# EAGLE board afe_rev_05-12-17 (EAGLE 8.4.3)
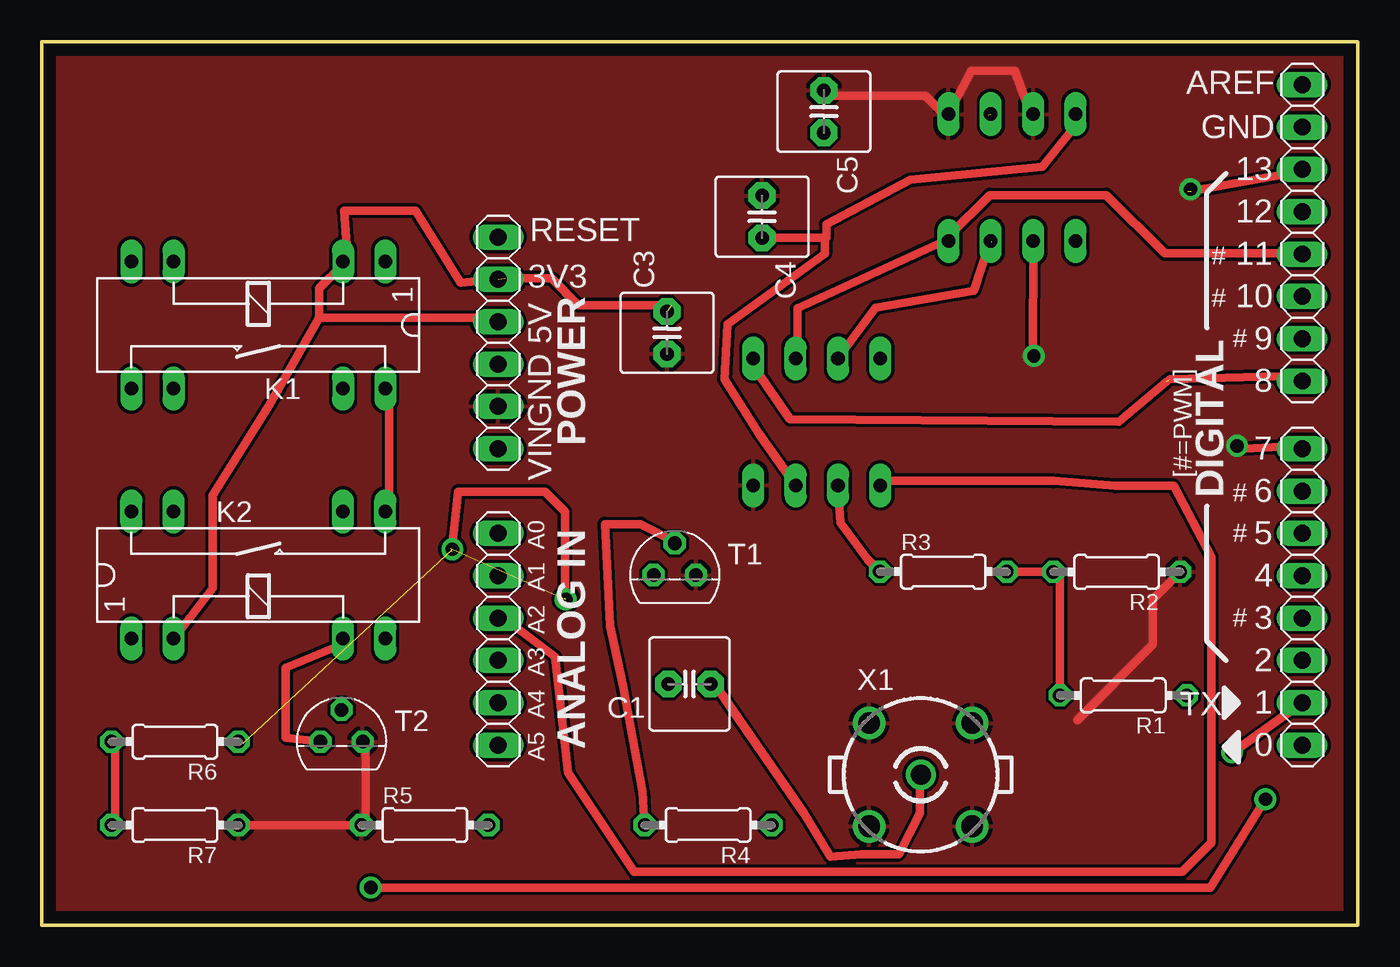
[diagram p0: board, top side]
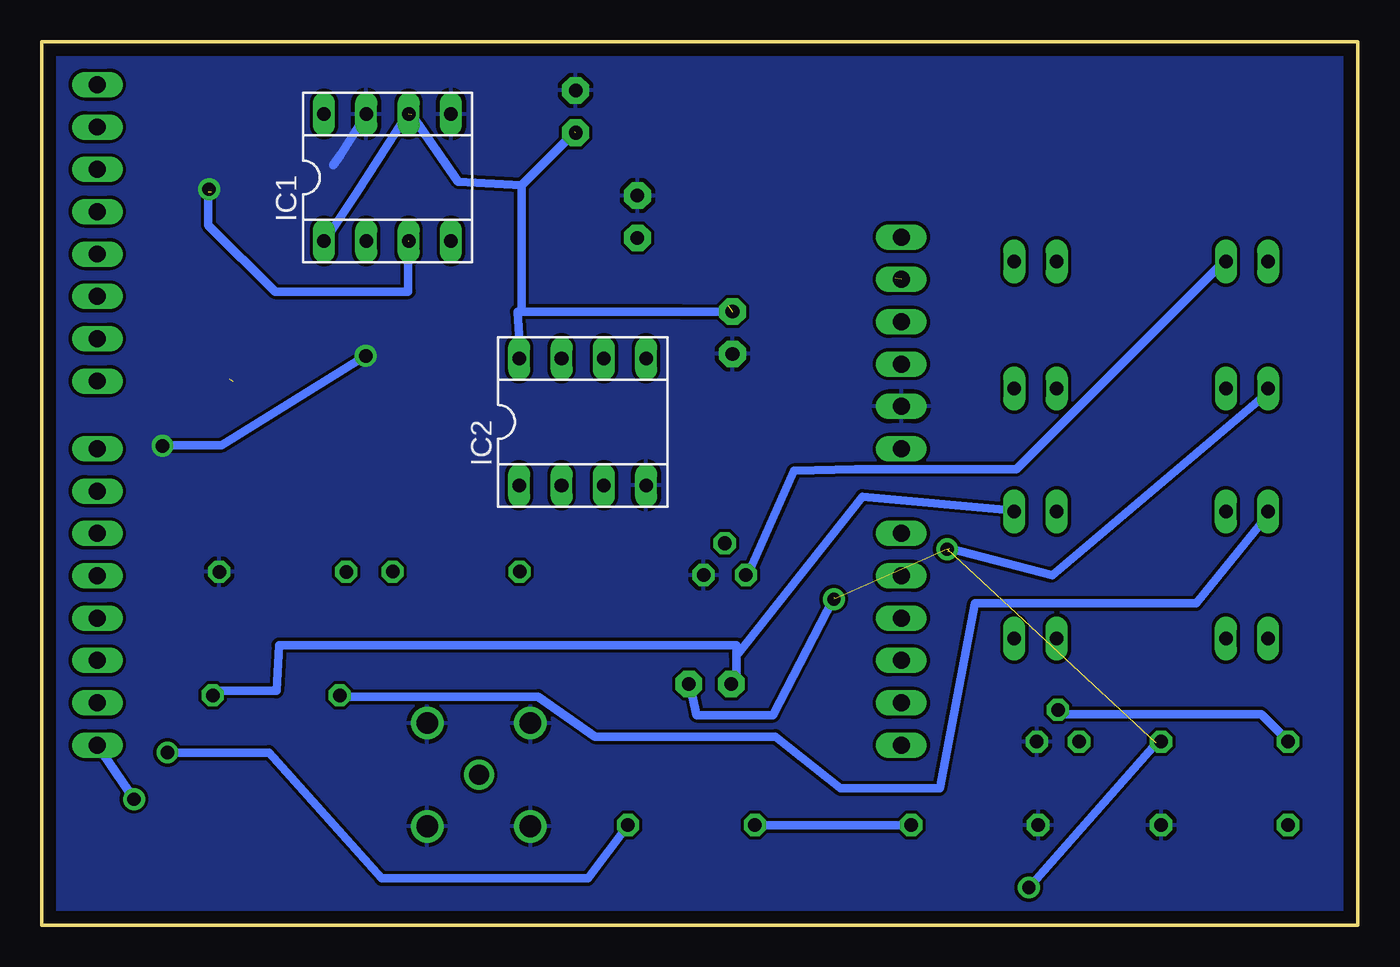
[diagram p1: board, bottom side, seen from below]

Size 79 x 53 mm. Coordinates in mm from the lower left corner, seen from the top.
Outline: 0,0 79,0 79,53 0,53 0,0
Copper layers (1*16): Top 0.035mm / dielectric 1.5mm / Bottom 0.035mm
Design rules "default *": minimum track width 0.5mm, minimum drill 12mil, track to track 0.2mm, track to pad 0.2mm, pad to pad 0.2mm, via to via 0.2mm, smd to smd 0.2mm, copper to edge 30mil, drill to drill 12mil, minimum pad ring 10mil, minimum via ring 10mil, stop-mask expansion 1mil, vias tented up to drill 0mil, thermal gap 10mil
Net classes: 0 default: width 0.152 mm, drill 0.305 mm, clearance 0.152 mm

## Footprints (pad centres in the part's own frame; a part is rotated, then mirrored left to right if it is on the bottom)
1X06 = drill 1.016 long: 1 -6.35,0; 2 -3.81,0; 3 -1.27,0; 4 1.27,0; 5 3.81,0; 6 6.35,0
C2.5-6 = drill 0.813 pad 1.6 octagon: 1 -1.27,0; 2 1.27,0
SOCKET-08 = drill 0.813 long: 1 -3.81,-3.81; 2 -1.27,-3.81; 3 1.27,-3.81; 4 3.81,-3.81; 5 3.81,3.81; 6 1.27,3.81; 7 -1.27,3.81; 8 -3.81,3.81
1X08 = drill 1.016 long: 1 -8.89,0; 2 -6.35,0; 3 -3.81,0; 4 -1.27,0; 5 1.27,0; 6 3.81,0; 7 6.35,0; 8 8.89,0
HE751 = drill 0.813 long: 1 -7.62,-3.81; 2 -5.08,-3.81; 6 5.08,-3.81; 7 7.62,-3.81; 8 7.62,3.81; 9 5.08,3.81; 13 -5.08,3.81; 14 -7.62,3.81
0204/7 = drill 0.813 octagon: 1 -3.81,0; 2 3.81,0
TO92 = drill 0.813 octagon: 1 1.27,0; 2 0,1.905; 3 -1.27,0
B35N61 = drill 1.2: 1 0,0 | drill 1.3: 2 3.099,3.099; 3 -3.099,3.099; 4 -3.099,-3.099; 5 3.099,-3.099

## Placement (x,y rotation side)
AD  [1X06]  27.4,17.14 270 top
C1  100n  [C2.5-6]  38.88,14.46 180 top
C3  100n  [C2.5-6]  37.53,35.53 90 top
C4  100n  [C2.5-6]  43.24,42.49 270 top
C5  100n  [C2.5-6]  46.95,48.8 270 top
IC1  [SOCKET-08]  58.24,44.85 0 bottom
IC2  [SOCKET-08]  46.52,30.18 0 bottom
IOH  [1X08]  75.66,41.53 90 top
IOL  [1X08]  75.66,19.69 90 top
K1  HE751  [HE751]  13,36 180 top
K2  HE751  [HE751]  13,21 0 top
POWER  [1X06]  27.4,34.92 270 top
R1  9.1M  [0204/7]  64.92,13.78 180 top
R2  1M  [0204/7]  64.53,21.19 180 top
R3  27k  [0204/7]  54.12,21.2 0 top
R4  1k  [0204/7]  40,6 180 top
R5  10k  [0204/7]  23,6 0 top
R6  1k  [0204/7]  8,11 180 top
R7  10k  [0204/7]  8,6 180 top
T1  BC337  [TO92]  38,21 0 top
T2  BC337  [TO92]  18,11 0 top
X1  BN35N61  [B35N61]  52.76,9.02 0 top

## Library data of the parts
AD IOH IOL POWER = pinhead
C1 C3-C5 = capacitor-wima
IC1 IC2 = ic-package
K1 K2 = relay; OC_FARNELL: unknown; OC_NEWARK: unknown
R1-R7 = resistor
T1 T2 = transistor-neu-to92
X1 = con-coax; OC_FARNELL: unknown; OC_NEWARK: unknown

## Nets
5V: K1.2 K2.2 POWER.3
AC_DC: C1.1 K1.8 X1.1
CH0: IC2.2 R3.1
CS1: IOL.8
CS2: IC2.5 IOH.1
GND: C3.1 C4.1 C5.1 IC1.5 IC1.7 IC2.4 POWER.5 R2.1 R5.1 R7.1 T1.1 T2.1 X1.2 X1.3 X1.4 X1.5
MOSI: IC1.4 IC2.6 IOH.4
N$2: K1.6 T1.3
N$3: R4.2 R5.2
N$4: R6.2 R7.2 T2.2
N$5: K2.6 T2.3
N$7: IOL.1 R6.1
N$8: IOL.2 R4.1
N$13: K2.14 R1.2 R2.2 R3.2
S$1: IC1.8
S$2: IC1.2
SCLK: IC1.3 IC2.7 IOH.6
VDD: C3.2 C5.2 IC1.1 IC1.6 IC2.8 POWER.2
VOUT: AD.3 IC2.1
VOUT-VREF: C4.2 IC2.3
X1_X10: C1.2 K1.14 K2.8 R1.1

## Tracks (layer width: path | path; a pad name or v marks a point on that pad's centre or on a via)
5V
  Top 0.5: 16.65,36.45 16.65,38.2 18.05,39.6 K1.2 | 16.65,36.45 13.65,31.2 10.25,25.8 10.25,20.2 K2.2 | 16.65,36.45 27.15,36.45 POWER.3
AC_DC  (2 unrouted)
  Top 0.5: X1.1 52.7,8.8 52.7,6.7 51.45,4.25 49.2,4.25 47.35,4.1 45.75,6.7 40.45,14.4 C1.1
  Top 0.508: 31.4,19.6 31.4,24.8 30.2,26 25,26 24.6,22.4
  Bottom 0.5: 24.55,22.6 18.35,21 5.45,31.9 K1.8 | 31.45,19.65 35.1,12.6 39.7,12.6 40.1,14.4 C1.1
CH0
  Top 0.5: IC2.2 47.8,26.3 47.95,24.15 49.55,21.95 R3.1
CS1
  Top 0.5: 71.65,28.55 75.45,28.75 IOL.8
CS2  (1 unrouted)
  Top 0.5: 67.5,32.6 64.65,30.2 44.9,30.35 42.9,33.25 IC2.5 | 67.7,32.75 75.45,32.95 IOH.1
GND  (via drill 0.8)
  Top 0.5: IC1.7 59.35,48.7 58.4,51.25 55.8,51.25 54.45,48.7 IC1.5 54.1,48.7 53.05,49.75 47.1,49.75 C5.1 | R7.1 R5.1 19.45,6 19.45,10.9 T2.1 | 55.85,6 X1.5 | 55.85,11.95 X1.2 56.2,12.3 | 62.15,12.3 66.7,16.85 66.7,19.55 R2.1
  Bottom 0.5: 61.5,45.6 61.05,46.2 59.7,48.35 IC1.7
  other vias: 71.75,28.75 68.95,44.15 59.55,34.15
  pour Top: -4,55 83,55 83,-2 -4,-2
  pour Bottom: -2,59 85,59 85,-4 -2,-4
MOSI
  Top 0.5: IC2.6 45.35,34 45.35,37 54.1,41 IC1.4 54.45,41.35 56.9,43.8 63.9,43.8 67.4,40.3 75.45,40.3 IOH.4
N$2
  Bottom 0.5: T1.3 36.6,21.05 33.85,27.25 30.15,27.35 20.5,27.35 8.25,39.6 K1.6
N$3
  Top 0.5: 33.8,24.05 34.1,17.95 34.9,14.35 36.05,8 R4.2
  Top 0.508: 33.8,24.05 35.95,24.05 38,23
  Bottom 0.5: R4.2 R5.2
N$4
  Top 0.5: R7.2 4.4,6 4.4,10.9 R6.2
  Bottom 0.5: T2.2 17.7,12.65 5.8,12.65 4.4,11.25 R6.2
N$5
  Top 0.5: T2.3 14.65,11.25 14.65,15.45 18.05,16.85 K2.6
N$7  (via drill 0.8)  (2 unrouted)
  Top 0.5: v19.75,2.25 70.15,2.25 v73.45,7.55
  Bottom 0.5: v19.75,2.25 12.1,10.9 R6.1 | v73.45,7.55 IOL.1
  other vias: 31.45,19.55 24.65,22.55
N$8  (via drill 0.8)
  Top 0.5: v71.45,10.35 IOL.2
  Bottom 0.5: 71.65,10.55 v71.45,10.35 65.35,10.35 58.6,2.8 46.21,2.8 R4.1
N$13
  Top 0.152: R2.2
  Top 0.5: R2.2 R3.2 | R2.2 61.11,20.8 R1.2
  Bottom 0.5: K2.14 5.45,24.55 9.7,19.3 23,19.3 25.1,8.2 31.05,8.2 34.95,11.3 45.8,11.3 49.2,13.7 61.1,13.7 R1.2
S$1
  Top 0.5: IC1.8 61.8,48.35 61.8,47.65 60.05,45.5 52.15,44.7 47.1,42.05 47.1,41.23
S$2
  Top 0.5: 59.5,34.2 IC1.2
S$3
  Bottom 0.152: 72,29 71.8,28.8
  Bottom 0.508: 71.8,28.8 68.2,28.8 59.8,34
SCLK  (2 unrouted)
  Top 0.5: IC2.7 50.05,37.05 55.95,38.05 56.9,41 IC1.3 | 68.8,44 75.45,45.2 IOH.6
  Bottom 0.508: 69,44 69,42 65,38 57,38 57,41
VDD  (4 unrouted)
  Top 0.5: 56.9,48.35 IC1.6 | 18.4,39.6 18.15,42.85 22.45,42.85 25.15,38.55 POWER.2
  Top 0.508: 37.8,37.2 32.2,37.2 30.6,38.8 27.8,38.8
  Bottom 0.5: IC2.8 50.25,34 50.45,36.8 50.2,36.8 40.65,36.8 C3.2 | IC1.1 61.8,41.35 60.2,43.8 57.25,48.35 IC1.6
  Bottom 0.508: 50.2,36.8 50.2,44.4 | 50.2,44.4 47,47.6 | 50.2,44.4 54,44.6 56.8,48.6
VOUT
  Top 0.5: IC2.1 50.6,26.65 60.75,26.65 64.45,26.35 67.95,26.35 70.2,22.1 70.2,4.95 68.45,3.2 35.55,3.2 31.6,9.15 30.8,16.1 27.5,18.6 AD.3
VOUT-VREF
  Top 0.5: C4.2 47,41.23 47,40.27 41.18,36.04 40.98,32.75 43.05,29.47 IC2.3
X1_X10
  Top 0.5: 68.45,13.7 R1.1 | K2.8 20.85,24.9 20.85,31.9 K1.14
  Bottom 0.5: 37.3,16.15 37.3,16.8 64.75,16.8 64.9,14.05 68.45,14.05 R1.1 | 37.3,16.15 37.3,14.75 C1.2 | 37.3,16.15 29.75,25.7 20.85,24.9 K2.8

## Text on the board
tPlace: 13 | 12 | 11 | 10 | 9 | 8 | 7 | 6 | 5 | 4 | 3 | 2 | 1 | 0
tNames: AREF | GND | RESET | # | 3V3 | 5V | # | DIGITAL | # | GND | [#=PWM] | VIN | # | A0 | ANALOG IN | # | A1 | A2 | # | A3 | A4 | TX | A5
214bmp: D:/SmartProjects/Snc/a4_bn_logo2.bmp